# Altium PCB BMI088_CORE.PcbDoc
Units mil, origin at the board's own origin, x right, y up, seen from the top; angles counter-clockwise.
Board outline 3866.14 x 748.03 mil, 2 copper layers (Top Layer, Bottom Layer); 70 components, 18 nets, 335 pads, 170 vias.
Unrouted connection lines stored in the file: 72.
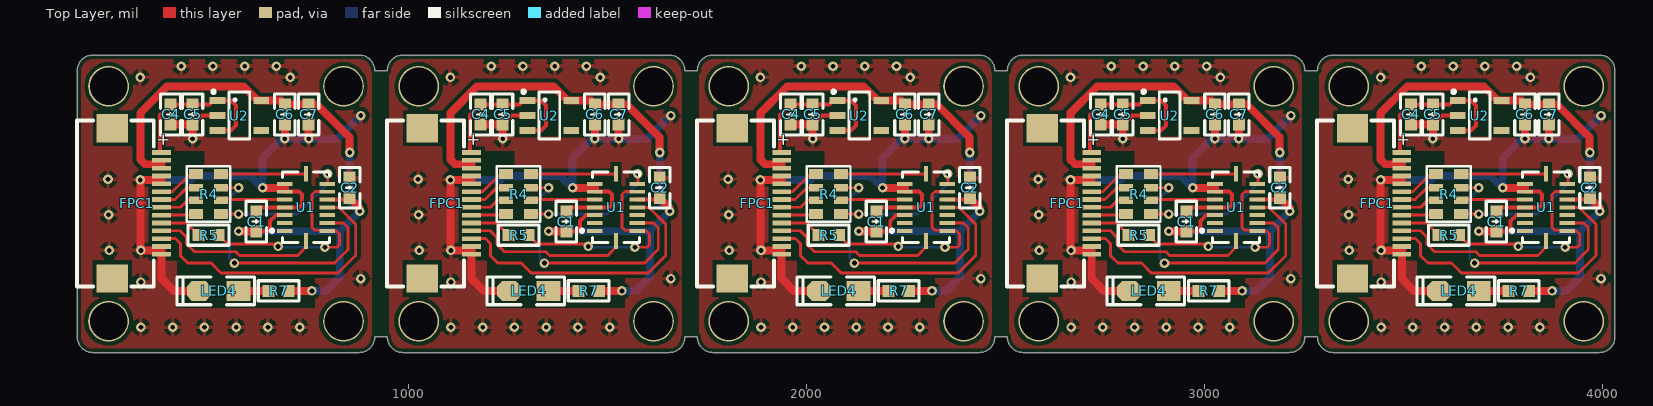
[diagram p0: Top Layer view]
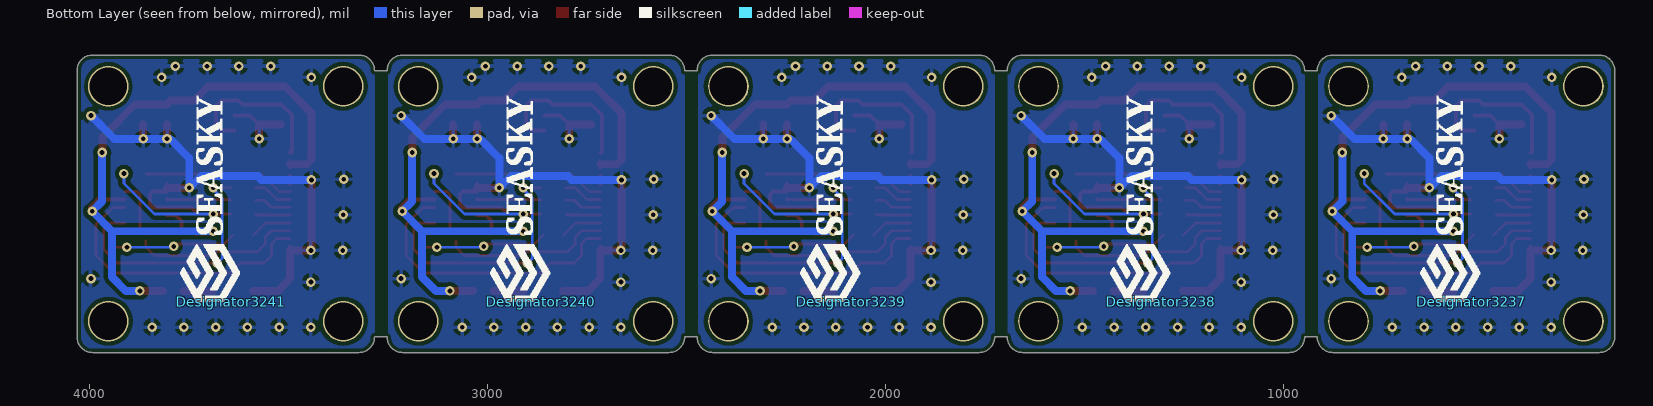
[diagram p1: Bottom Layer view, seen from below]
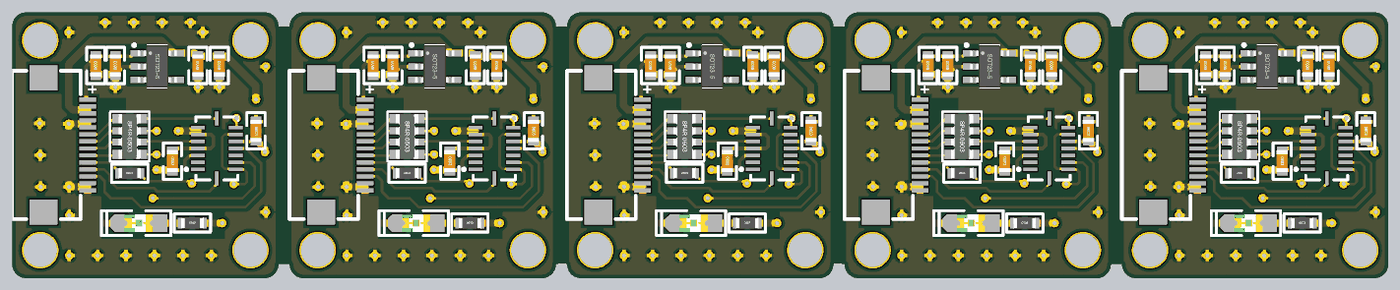
[diagram p2: 3D render of the assembled board from above, using the file's embedded part models]

## Layer stack, top to bottom
Top Solder: solder mask 0.4, Solder Resist, Dk 3.5
Top Layer: signal copper 1.4
Dielectric 1: dielectric 12.6, FR-4, Dk 4.8
Bottom Layer: signal copper 1.4
Bottom Solder: solder mask 0.4, Solder Resist, Dk 3.5

## Board outline
166.26,185.08 ccw(c205.63,185.08) 205.63,145.71 874.92,145.71 ccw(c874.92,185.08) 914.29,185.08 945.79,185.08 ccw(c985.16,185.08) 985.16,145.71 1654.45,145.71 ccw(c1654.45,185.08) 1693.82,185.08 1725.31,185.08 ccw(c1764.68,185.08) 1764.68,145.71 2433.98,145.71 ccw(c2433.98,185.08) 2473.35,185.08 2504.84,185.08 ccw(c2544.21,185.08) 2544.21,145.71 3213.5,145.71 ccw(c3213.5,185.08) 3252.87,185.08 3284.37,185.08 ccw(c3323.74,185.08) 3323.74,145.71 3993.03,145.71 ccw(c3993.03,185.08) 4032.4,185.08 4032.4,854.37 ccw(c3993.03,854.37) 3993.03,893.74 3323.74,893.74 ccw(c3323.74,854.37) 3284.37,854.37 3268.62,854.37 3252.87,854.37 ccw(c3213.5,854.37) 3213.5,893.74 2544.21,893.74 ccw(c2544.21,854.37) 2504.84,854.37 2489.09,854.37 2473.35,854.37 ccw(c2433.98,854.37) 2433.98,893.74 1764.68,893.74 ccw(c1764.68,854.37) 1725.31,854.37 1709.57,854.37 1693.82,854.37 ccw(c1654.45,854.37) 1654.45,893.74 985.16,893.74 ccw(c985.16,854.37) 945.79,854.37 930.04,854.37 914.29,854.37 ccw(c874.92,854.37) 874.92,893.74 205.63,893.74 ccw(c205.63,854.37) 166.26,854.37

## Design rules (kind name [scope] priority, off if disabled: settings)
BoardOutlineClearance [All] p1: gap=10 ignorepadtopadclearanceinfootprint=FALSE except(0: Arc-SplitContinuation Track-SplitContinuation SMDPad-SplitContinuation THPad-SplitContinuation Via-SplitContinuation Fill-SplitContinuation Poly-SplitContinuation Region-SplitContinuation Text-SplitContinuation)
Clearance [All] p1: gap=10 ignorepadtopadclearanceinfootprint=FALSE except(0: Arc-Hole Track-Hole SMDPad-Hole THPad-Hole Via-Hole Fill-Hole Poly-Hole Region-Hole Text-Hole)
PolygonConnect [All] p1: connectstyle=Relief reliefconductorwidth=10 reliefentries=4 polygonreliefangle="90 Angle" airgapwidth=10
RoutingVias [All] p1: holewidth=28 width=50 viastyle="Through Hole" minholewidth=28 minwidth=50 maxholewidth=28 maxwidth=50
SolderMaskExpansion [All] p1: expansion=4
Width [All] p1: maxlimit=10 minlimit=10 preferedwidth=10
30 further rules are at their usual default settings.

## Components (designator, comment, footprint, x,y, rotation, side; value= is the part's Value field where it differs from the comment)
C1 "0.1uF" "C 0603_L" 3734.37,475.11 r270 top
C1 "0.1uF" "C 0603_L" 2954.85,475.11 r270 top
C1 "0.1uF" "C 0603_L" 2175.32,475.11 r270 top
C1 "0.1uF" "C 0603_L" 1395.79,475.11 r270 top
C1 "0.1uF" "C 0603_L" 616.26,475.11 r270 top
C2 "0.1uF" "C 0603_L" 3969.37,560.04 r270 top
C2 "0.1uF" "C 0603_L" 3189.84,560.04 r270 top
C2 "0.1uF" "C 0603_L" 2410.31,560.04 r270 top
C2 "0.1uF" "C 0603_L" 1630.79,560.04 r270 top
C2 "0.1uF" "C 0603_L" 851.26,560.04 r270 top
C4 "10uF" "C 0603_L" 3519.04,744.24 r90 top
C4 "10uF" "C 0603_L" 2739.51,744.24 r90 top
C4 "10uF" "C 0603_L" 1959.98,744.24 r90 top
C4 "10uF" "C 0603_L" 1180.45,744.24 r90 top
C4 "10uF" "C 0603_L" 400.93,744.24 r90 top
C5 "0.1uF" "C 0603_L" 3574.37,744.24 r90 top
C5 "0.1uF" "C 0603_L" 2794.84,744.24 r90 top
C5 "0.1uF" "C 0603_L" 2015.31,744.24 r90 top
C5 "0.1uF" "C 0603_L" 1235.79,744.24 r90 top
C5 "0.1uF" "C 0603_L" 456.26,744.24 r90 top
C6 "10uF" "C 0603_L" 3806.13,744.24 r90 top
C6 "10uF" "C 0603_L" 3026.6,744.24 r90 top
C6 "10uF" "C 0603_L" 2247.08,744.24 r90 top
C6 "10uF" "C 0603_L" 1467.55,744.24 r90 top
C6 "10uF" "C 0603_L" 688.02,744.24 r90 top
C7 "0.1uF" "C 0603_L" 3866.13,744.24 r90 top
C7 "0.1uF" "C 0603_L" 3086.6,744.24 r90 top
C7 "0.1uF" "C 0603_L" 2307.08,744.24 r90 top
C7 "0.1uF" "C 0603_L" 1527.55,744.24 r90 top
C7 "0.1uF" "C 0603_L" 748.02,744.24 r90 top
Designator3237 "Comment" SEASKY1 527.57,273.06 r90 bottom
Designator3238 "Comment" SEASKY1 1307.09,273.06 r90 bottom
Designator3239 "Comment" SEASKY1 2086.62,273.06 r90 bottom
Designator3240 "Comment" SEASKY1 2866.15,273.06 r90 bottom
Designator3241 "Comment" SEASKY1 3645.68,273.06 r90 bottom
FPC1 "FPC14" FPC-SMD_P0.50-14P_QCHF-SM-H2.0 3434.37,520.71 r90 top
FPC1 "FPC14" FPC-SMD_P0.50-14P_QCHF-SM-H2.0 2654.84,520.71 r90 top
FPC1 "FPC14" FPC-SMD_P0.50-14P_QCHF-SM-H2.0 1875.31,520.71 r90 top
FPC1 "FPC14" FPC-SMD_P0.50-14P_QCHF-SM-H2.0 1095.79,520.71 r90 top
FPC1 "FPC14" FPC-SMD_P0.50-14P_QCHF-SM-H2.0 316.26,520.71 r90 top
LED4 "红色" "LED 0805G" 3639.96,300.71 r180 top
LED4 "红色" "LED 0805G" 2860.43,300.71 r180 top
LED4 "红色" "LED 0805G" 2080.9,300.71 r180 top
LED4 "红色" "LED 0805G" 1301.37,300.71 r180 top
LED4 "红色" "LED 0805G" 521.85,300.71 r180 top
R4 "220R" RCA-8P4R-0603 3614.37,544.29 r270 top
R4 "220R" RCA-8P4R-0603 2834.84,544.29 r270 top
R4 "220R" RCA-8P4R-0603 2055.31,544.29 r270 top
R4 "220R" RCA-8P4R-0603 1275.79,544.29 r270 top
R4 "220R" RCA-8P4R-0603 496.26,544.29 r270 top
R5 "220R" "R 0603_L" 3614.37,441.06 r0 top
R5 "220R" "R 0603_L" 2834.84,441.06 r0 top
R5 "220R" "R 0603_L" 2055.31,441.06 r0 top
R5 "220R" "R 0603_L" 1275.79,441.06 r0 top
R5 "220R" "R 0603_L" 496.26,441.06 r0 top
R7 "10K" "R 0603_L" 3790.54,300.71 r0 top
R7 "10K" "R 0603_L" 3011.02,300.71 r0 top
R7 "10K" "R 0603_L" 2231.49,300.71 r0 top
R7 "10K" "R 0603_L" 1451.96,300.71 r0 top
R7 "10K" "R 0603_L" 672.43,300.71 r0 top
U1 "BMI088" BOSC-LGA-16-BMI088_V 3859.37,510.71 r90 top
U1 "BMI088" BOSC-LGA-16-BMI088_V 3079.84,510.71 r90 top
U1 "BMI088" BOSC-LGA-16-BMI088_V 2300.31,510.71 r90 top
U1 "BMI088" BOSC-LGA-16-BMI088_V 1520.79,510.71 r90 top
U1 "BMI088" BOSC-LGA-16-BMI088_V 741.26,510.71 r90 top
U2 "RT9013-33GB" SOT23-5L 3691.96,741.51 r270 top
U2 "RT9013-33GB" SOT23-5L 2912.43,741.51 r270 top
U2 "RT9013-33GB" SOT23-5L 2132.9,741.51 r270 top
U2 "RT9013-33GB" SOT23-5L 1353.38,741.51 r270 top
U2 "RT9013-33GB" SOT23-5L 573.85,741.51 r270 top

## Footprints (in the part's own frame and the unit in brackets; to place one, negate y for a bottom-side part, rotate by r counter-clockwise, add the part's x,y. Pads: shape width x height; smd on the part's side, far side on the other; paste and mask are expansions set on the pad)
BOSC-LGA-16-BMI088_V [mm] "LGA, 16-Leads, Body 3.0x4.5mm, Pitch 0.5mm"
  rect 0.25x1 smd: 1(-1.5,1.35) 2(-1,1.35) 3(-0.5,1.35) 4(0,1.35) 5(0.5,1.35) 6(1,1.35) 7(1.5,1.35) 9(1.5,-1.35) 10(1,-1.35) 11(0.5,-1.35) 12(0,-1.35) 13(-0.5,-1.35) 14(-1,-1.35) 15(-1.5,-1.35)
  rect 1x0.25 smd: 8(2.15,0) 16(-2.15,0)
  silkscreen extent -2.25,-1.5 2.25,2.28, body extent -2.25,-1.5 2.25,1.5, height 0.95
"C 0603_L" [mil] "无极性贴片电容                                       淘宝ID:黄晶宝石"
  rect 30x30 smd: 1(-25.59,0) 2(25.59,0)
  silkscreen extent -51,-26 51,26, body extent -31,-16 31,16, height 32
FPC-SMD_P0.50-14P_QCHF-SM-H2.0 [mm]
  rect 0.3x1.2 smd: 1(3.25,-1.575) 2(2.75,-1.575) 3(2.25,-1.575) 4(1.75,-1.575) 5(1.25,-1.575) 6(0.75,-1.575) 7(0.25,-1.575) 8(-0.25,-1.575) 9(-0.75,-1.575) 10(-1.25,-1.575) 11(-1.75,-1.575) 12(-2.25,-1.575) 13(-2.75,-1.575) 14(-3.25,-1.575)
  rect 1.8x2 smd: 15(4.8,1.575) 16(-4.8,1.575)
  silkscreen extent -5.3,-1.08 5.3,3.82
"LED 0805G" [mil] "绿色0805LED                              淘宝ID:黄晶宝石"
  rect 60x50 smd: 1(-50,0)
  oct 60x50 smd: 2(50,0)
  silkscreen extent -90,-35 105,35, body extent -39,-25 39,25, height 26
"R 0603_L" [mil] "1/10W贴片电阻                 淘宝ID:黄晶宝石"
  rect 30x30 smd: 1(-25.59,0) 2(25.59,0)
  silkscreen extent -51,-26 51,26, body extent -31,-16 32,16, height 16
RCA-8P4R-0603 [mm] "3.2mm*1.6mm*0.6mm(长*宽*厚)"
  rect 0.65x0.9 smd: 1(-1.28,-0.8) 4(1.28,-0.8) 5(1.28,0.8) 8(-1.28,0.8)
  rect 0.5x0.9 smd: 2(-0.4,-0.8) 3(0.4,-0.8) 6(0.4,0.8) 7(-0.4,0.8)
  silkscreen extent -1.78,-1.4 1.78,1.4, body extent -1.6,-0.8 1.6,0.8, height 0.6
SEASKY1 [mil]
  silkscreen extent 0,-23 518,126
SOT23-5L [mm] "3x1.6x1.1mm(长宽高) 封装库来自淘宝卖家 ID：黄晶宝石"
  rect 0.45x1 smd: 1(-0.95,-1.4) 2(0,-1.4) 3(0.95,-1.4) 4(0.95,1.4) 5(-0.95,1.4)
  silkscreen extent -1.6,-1.73 1.5,0.66, body extent -1.5,-1.4 1.5,1.4, height 1.15

## Part data
C1 C1 C1 C1 C1 C2 C2 C2 C2 C2 C4 C4 C4 C4 C4 C5 C5 C5 C5 C5 C6 C6 C6 C6 C6 C7 C7 C7 C7 C7: library part C, "贴片电容"
LED4 LED4 LED4 LED4 LED4: library part LED-SMD, "贴片LED"
R4 R4 R4 R4 R4: library part R-8P4R, "贴片排阻"
R5 R5 R5 R5 R5 R7 R7 R7 R7 R7: library part R, "贴片电阻"
U1 U1 U1 U1 U1: library part BOSC-BMI088-LGA-16, "6-axis Motion Tracking for High-performance Applications,", Manufacturer_Name=Bosch, Arrow Part Number=BMI088, Arrow Price/Stock=https://www.arrow.com/en/products/bmi088/bosch, Datasheet Link=https://ae-bst.resource.bosch.com/media/_tech/media/datasheets/BST-BMI088-DS001-13.pdf, Geometry.Height=1.45mm, Manufacturer_Part_Number=BMI088

## Free pads (board coordinates)
  round 102.36 hole 94.49: ""(245,224.45) ""(245,815) ""(835.55,224.45) ""(835.55,815) ""(1024.53,224.45) ""(1024.53,815) ""(1615.08,224.45) ""(1615.08,815) ""(1804.05,224.45) ""(1804.05,815) ""(2394.61,224.45) ""(2394.61,815) ""(2583.58,224.45) ""(2583.58,815) ""(3174.13,224.45) ""(3174.13,815) ""(3363.11,224.45) ""(3363.11,815) ""(3953.66,224.45) ""(3953.66,815)

## Via types
v1: diameter 24, hole 12, Top Layer to Bottom Layer, 170 vias

## Nets (pads, with @x,y where several pads share a name; then routed paths per layer and width w, separated by ;. In a path a pad name is that pad's centre, name@x,y a point inside that pad or via, vN(x,y) a via of type N, cw(c..) or ccw(c..) an arc to the next point about the centre after c; other vN are vias at no path point)
CSB_ACCEL: R4.7 U1.14 | length 3302.4
  Top Layer w7: R4.7@527.76,560.04 v1(571.85,560.04) ; v1(561.26,370.71) 813.5,370.71 847.2,404.4 847.2,459.69 835.55,471.34 U1.14@794.41,471.34 ; R4.7@1307.28,560.04 v1(1351.38,560.04) ; v1(1340.79,370.71) 1593.03,370.71 1626.72,404.4 1626.72,459.69 1615.08,471.34 U1.14@1573.94,471.34 ; R4.7@2086.81,560.04 v1(2130.9,560.04) ; v1(2120.31,370.71) 2372.56,370.71 2406.25,404.4 2406.25,459.69 2394.61,471.34 U1.14@2353.46,471.34 ; R4.7@2866.34,560.04 v1(2910.43,560.04) ; v1(2899.84,370.71) 3152.09,370.71 3185.78,404.4 3185.78,459.69 3174.13,471.34 U1.14@3132.99,471.34 ; R4.7@3645.87,560.04 v1(3689.96,560.04) ; v1(3679.37,370.71) 3931.61,370.71 3965.31,404.4 3965.31,459.69 3953.66,471.34 U1.14@3912.52,471.34
  Bottom Layer w7: v1(561.26,370.71) 549.35,382.62 549.35,533.8 571.85,556.3 v1(571.85,560.04) ; v1(1340.79,370.71) 1328.87,382.62 1328.87,533.8 1351.38,556.3 v1(1351.38,560.04) ; v1(2120.31,370.71) 2108.4,382.62 2108.4,533.8 2130.9,556.3 v1(2130.9,560.04) ; v1(2899.84,370.71) 2887.93,382.62 2887.93,533.8 2910.43,556.3 v1(2910.43,560.04) ; v1(3679.37,370.71) 3667.46,382.62 3667.46,533.8 3689.96,556.3 v1(3689.96,560.04)
CSB_GYRO: R4.6 U1.5 | length 806.2
  Top Layer w7: R4.6@527.76,528.55 529.53,530.32 529.6,530.39 U1.5@688.11,530.39 ; R4.6@1307.28,528.55 1309.05,530.32 1309.13,530.39 U1.5@1467.64,530.39 ; R4.6@2086.81,528.55 2088.58,530.32 2088.66,530.39 U1.5@2247.17,530.39 ; R4.6@2866.34,528.55 2868.11,530.32 2868.19,530.39 U1.5@3026.69,530.39 ; R4.6@3645.87,528.55 3647.64,530.32 3647.71,530.39 U1.5@3806.22,530.39
  Top Layer w10: U1.5@688.03,530.32 U1.5@688.11,530.39 ; U1.5@1467.56,530.32 U1.5@1467.64,530.39 ; U1.5@2247.09,530.32 U1.5@2247.17,530.39 ; U1.5@3026.61,530.32 U1.5@3026.69,530.39 ; U1.5@3806.14,530.32 U1.5@3806.22,530.39
GND: C1.1 C2.1 C4.1 C5.1 C6.1 C7.1 FPC1.4 FPC1.5 FPC1.13 FPC1.14 LED4.2 U1.4 U1.6 U1.7 U2.2 | length 8408.8
  Top Layer w10: FPC1.14@378.27,392.76 378.27,402.6 FPC1.13@378.27,412.44 ; FPC1.5@378.27,569.92 378.27,579.76 FPC1.4@378.27,589.61 ; C5.1@456.26,718.64 479.13,741.51 U2.2@518.73,741.51 ; C1.1@616.26,500.71 626.26,510.71 688.11,510.71 688.19,510.79 723.87,510.79 731.26,518.18 731.26,542.77 723.95,550.08 688.11,550.08 688.11,559.92 U1.7@688.11,569.76 ; FPC1.14@1157.8,392.76 1157.8,402.6 FPC1.13@1157.8,412.44 ; FPC1.5@1157.8,569.92 1157.8,579.76 FPC1.4@1157.8,589.61 ; C5.1@1235.79,718.64 1258.66,741.51 U2.2@1298.26,741.51 ; C1.1@1395.79,500.71 1405.79,510.71 1467.64,510.71 1467.72,510.79 1503.4,510.79 1510.79,518.18 1510.79,542.77 1503.48,550.08 1467.64,550.08 1467.64,559.92 U1.7@1467.64,569.76 ; FPC1.14@1937.32,392.76 1937.32,402.6 FPC1.13@1937.32,412.44 ; FPC1.5@1937.32,569.92 1937.32,579.76 FPC1.4@1937.32,589.61 ; C5.1@2015.32,718.64 2038.19,741.51 U2.2@2077.79,741.51 ; C1.1@2175.31,500.71 2185.31,510.71 2247.17,510.71 2247.24,510.79 2282.93,510.79 2290.32,518.18 2290.32,542.77 2283.01,550.08 2247.17,550.08 2247.17,559.92 U1.7@2247.17,569.76 ; FPC1.14@2716.85,392.76 2716.85,402.6 FPC1.13@2716.85,412.44 ; FPC1.5@2716.85,569.92 2716.85,579.76 FPC1.4@2716.85,589.61 ; C5.1@2794.85,718.64 2817.71,741.51 U2.2@2857.31,741.51 ; C1.1@2954.84,500.71 2964.84,510.71 3026.69,510.71 3026.77,510.79 3062.45,510.79 3069.85,518.18 3069.85,542.77 3062.54,550.08 3026.69,550.08 3026.69,559.92 U1.7@3026.69,569.76 ; FPC1.14@3496.38,392.76 3496.38,402.6 FPC1.13@3496.38,412.44 ; FPC1.5@3496.38,569.92 3496.38,579.76 FPC1.4@3496.38,589.61 ; C5.1@3574.37,718.64 3597.24,741.51 U2.2@3636.84,741.51 ; C1.1@3734.37,500.71 3744.37,510.71 3806.22,510.71 3806.3,510.79 3841.98,510.79 3849.37,518.18 3849.37,542.77 3842.06,550.08 3806.22,550.08 3806.22,559.92 U1.7@3806.22,569.76
  Top Layer w20: FPC1.14@378.27,392.76 378.27,331.73 409.29,300.71 LED4.2@471.85,300.71 ; 378.27,402.6 v1(326.26,402.6) 324.84,404.02 v1(324.84,579.76) 378.27,579.76 ; C4.1@400.93,718.64 456.26,718.64 v1(456.26,683.07) ; v1(632.09,560.04) 632.21,559.92 688.11,559.92 ; v1(688.03,683.07) C6.1@688.03,718.64 ; v1(748.03,683.07) C7.1@748.03,718.64 ; FPC1.14@1157.8,392.76 1157.8,331.73 1188.82,300.71 LED4.2@1251.37,300.71 ; 1157.8,402.6 v1(1105.79,402.6) 1104.37,404.02 v1(1104.37,579.76) 1157.8,579.76 ; C4.1@1180.46,718.64 1235.79,718.64 v1(1235.79,683.07) ; v1(1411.62,560.04) 1411.74,559.92 1467.64,559.92 ; v1(1467.55,683.07) C6.1@1467.55,718.64 ; v1(1527.55,683.07) C7.1@1527.55,718.64 ; 1937.32,402.6 v1(1885.31,402.6) 1883.89,404.02 v1(1883.89,579.76) 1937.32,579.76 ; FPC1.14@1937.33,392.76 1937.33,331.73 1968.35,300.71 LED4.2@2030.9,300.71 ; C4.1@1959.99,718.64 2015.32,718.64 v1(2015.32,683.07) ; v1(2191.14,560.04) 2191.27,559.92 2247.17,559.92 ; v1(2247.08,683.07) C6.1@2247.08,718.64 ; v1(2307.08,683.07) C7.1@2307.08,718.64 ; FPC1.14@2716.85,392.76 2716.85,331.73 2747.88,300.71 LED4.2@2810.43,300.71 ; 2716.85,402.6 v1(2664.84,402.6) 2663.42,404.02 v1(2663.42,579.76) 2716.85,579.76 ; C4.1@2739.51,718.64 2794.85,718.64 v1(2794.85,683.07) ; v1(2970.67,560.04) 2970.79,559.92 3026.69,559.92 ; v1(3026.61,683.07) C6.1@3026.61,718.64 ; v1(3086.61,683.07) C7.1@3086.61,718.64 ; FPC1.14@3496.38,392.76 3496.38,331.73 3527.4,300.71 LED4.2@3589.96,300.71 ; 3496.38,402.6 v1(3444.37,402.6) 3442.95,404.02 v1(3442.95,579.76) 3496.38,579.76 ; C4.1@3519.04,718.64 3574.37,718.64 v1(3574.37,683.07) ; v1(3750.2,560.04) 3750.32,559.92 3806.22,559.92 ; v1(3806.14,683.07) C6.1@3806.14,718.64 ; v1(3866.14,683.07) C7.1@3866.14,718.64
  Bottom Layer w20: v1(324.84,579.76) 450.25,579.76 459.53,589.04 602.01,589.04 631.01,560.04 v1(632.09,560.04) 632.09,634.49 680.67,683.07 v1(688.03,683.07) v1(748.03,683.07) 820.74,683.07 v1(879.19,741.51) ; v1(1104.37,579.76) 1229.78,579.76 1239.06,589.04 1381.53,589.04 1410.53,560.04 v1(1411.62,560.04) 1411.62,634.49 1460.2,683.07 v1(1467.55,683.07) v1(1527.55,683.07) 1600.27,683.07 v1(1658.71,741.51) ; v1(1883.89,579.76) 2009.31,579.76 2018.59,589.04 2161.06,589.04 2190.06,560.04 v1(2191.14,560.04) 2191.14,634.49 2239.72,683.07 v1(2247.08,683.07) v1(2307.08,683.07) 2379.8,683.07 v1(2438.24,741.51) ; v1(2663.42,579.76) 2788.83,579.76 2798.11,589.04 2940.59,589.04 2969.59,560.04 v1(2970.67,560.04) 2970.67,634.49 3019.25,683.07 v1(3026.61,683.07) v1(3086.61,683.07) 3159.33,683.07 v1(3217.77,741.51) ; v1(3442.95,579.76) 3568.36,579.76 3577.64,589.04 3720.12,589.04 3749.12,560.04 v1(3750.2,560.04) 3750.2,634.49 3798.78,683.07 v1(3806.14,683.07) v1(3866.14,683.07) 3938.85,683.07 v1(3997.3,741.51)
  other v1: 326.26,209.46 406.1,209.46 485.94,209.46 565.77,209.46 645.61,209.46 725.45,209.46 1105.79,209.46 1185.63,209.46 1265.46,209.46 1345.3,209.46 1425.14,209.46 1504.98,209.46 1885.31,209.46 1965.15,209.46 2044.99,209.46 2124.83,209.46 2204.67,209.46 2284.51,209.46 2664.84,209.46 2744.68,209.46 2824.52,209.46 2904.36,209.46 2984.2,209.46 3064.03,209.46 3444.37,209.46 3524.21,209.46 3604.05,209.46 3683.88,209.46 3763.72,209.46 3843.56,209.46 326.26,322.76 1105.79,322.76 1885.31,322.76 2664.84,322.76 3444.37,322.76 879.19,331.73 1658.71,331.73 2438.24,331.73 3217.77,331.73 3997.3,331.73 246.42,402.6 1025.95,402.6 1805.48,402.6 2585,402.6 3364.53,402.6 245,491.89 1024.53,491.89 1804.05,491.89 2583.58,491.89 3363.11,491.89 243.58,581.19 1023.11,581.19 1802.63,581.19 2582.16,581.19 3361.69,581.19 324.84,837.37 701.77,837.37 1104.37,837.37 1481.3,837.37 1883.89,837.37 2260.82,837.37 2663.42,837.37 3040.35,837.37 3442.95,837.37 3819.88,837.37 427.49,865.71 507.32,865.71 587.16,865.71 667,865.71 1207.01,865.71 1286.85,865.71 1366.69,865.71 1446.53,865.71 1986.54,865.71 2066.38,865.71 2146.22,865.71 2226.06,865.71 2766.07,865.71 2845.91,865.71 2925.75,865.71 3005.58,865.71 3545.6,865.71 3625.43,865.71 3705.27,865.71 3785.11,865.71
INT1_ACCEL: FPC1.11 U1.16 | length 2112.6
  Top Layer w7: FPC1.11@378.27,451.81 425.04,451.81 441.26,435.59 441.26,418.61 460.86,399.01 564.78,399.01 573.85,389.94 720.49,389.94 741.26,410.71 U1.16@741.26,426.06 ; FPC1.11@1157.8,451.81 1204.56,451.81 1220.79,435.59 1220.79,418.61 1240.39,399.01 1344.31,399.01 1353.38,389.94 1500.02,389.94 1520.79,410.71 U1.16@1520.79,426.06 ; FPC1.11@1937.32,451.81 1984.09,451.81 2000.31,435.59 2000.31,418.61 2019.91,399.01 2123.83,399.01 2132.9,389.94 2279.55,389.94 2300.31,410.71 U1.16@2300.31,426.06 ; FPC1.11@2716.85,451.81 2763.62,451.81 2779.84,435.59 2779.84,418.61 2799.44,399.01 2903.36,399.01 2912.43,389.94 3059.08,389.94 3079.84,410.71 U1.16@3079.84,426.06 ; FPC1.11@3496.38,451.81 3543.15,451.81 3559.37,435.59 3559.37,418.61 3578.97,399.01 3682.89,399.01 3691.96,389.94 3838.6,389.94 3859.37,410.71 U1.16@3859.37,426.06
INT2_ACCEL: U1.1
INT3_GYRO: FPC1.12 U1.12 | length 3638.9
  Top Layer w7: FPC1.12@378.27,432.13 412.8,432.13 425.65,419.28 425.65,389.02 443.96,370.71 503.04,370.71 528.04,345.71 822.2,345.71 866.26,389.77 866.26,468.41 823.97,510.71 U1.12@794.41,510.71 ; FPC1.12@1157.8,432.13 1192.33,432.13 1205.18,419.28 1205.18,389.02 1223.49,370.71 1282.57,370.71 1307.57,345.71 1601.72,345.71 1645.79,389.77 1645.79,468.41 1603.49,510.71 U1.12@1573.94,510.71 ; FPC1.12@1937.32,432.13 1971.86,432.13 1984.7,419.28 1984.7,389.02 2003.02,370.71 2062.09,370.71 2087.09,345.71 2381.25,345.71 2425.31,389.77 2425.31,468.41 2383.02,510.71 U1.12@2353.46,510.71 ; FPC1.12@2716.85,432.13 2751.39,432.13 2764.23,419.28 2764.23,389.02 2782.54,370.71 2841.62,370.71 2866.62,345.71 3160.78,345.71 3204.84,389.77 3204.84,468.41 3162.55,510.71 U1.12@3132.99,510.71 ; FPC1.12@3496.38,432.13 3530.91,432.13 3543.76,419.28 3543.76,389.02 3562.07,370.71 3621.15,370.71 3646.15,345.71 3940.31,345.71 3984.37,389.77 3984.37,468.41 3942.08,510.71 U1.12@3912.52,510.71
INT4_GYRO: U1.13
NetFPC1_6: FPC1.6 R4.1 | length 524.5
  Top Layer w7: FPC1.6@378.27,550.24 406.12,550.24 450.57,594.69 R4.1@464.76,594.69 ; FPC1.6@1157.8,550.24 1185.65,550.24 1230.1,594.69 R4.1@1244.29,594.69 ; FPC1.6@1937.32,550.24 1965.18,550.24 2009.63,594.69 R4.1@2023.82,594.69 ; FPC1.6@2716.85,550.24 2744.71,550.24 2789.16,594.69 R4.1@2803.35,594.69 ; FPC1.6@3496.38,550.24 3524.23,550.24 3568.68,594.69 R4.1@3582.87,594.69
NetFPC1_7: FPC1.7 R4.2 | length 493.6
  Top Layer w7: FPC1.7@378.27,530.55 411.98,530.55 441.47,560.04 R4.2@464.76,560.04 ; FPC1.7@1157.8,530.55 1191.5,530.55 1221,560.04 R4.2@1244.29,560.04 ; FPC1.7@1937.32,530.55 1971.03,530.55 2000.53,560.04 R4.2@2023.82,560.04 ; FPC1.7@2716.85,530.55 2750.56,530.55 2780.05,560.04 R4.2@2803.35,560.04 ; FPC1.7@3496.38,530.55 3530.09,530.55 3559.58,560.04 R4.2@3582.87,560.04
NetFPC1_8: FPC1.8 R4.3 | length 469.1
  Top Layer w7: FPC1.8@378.27,510.87 425.97,510.87 443.64,528.55 R4.3@464.76,528.55 ; FPC1.8@1157.8,510.87 1205.49,510.87 1223.17,528.55 R4.3@1244.29,528.55 ; FPC1.8@1937.32,510.87 1985.02,510.87 2002.7,528.55 R4.3@2023.82,528.55 ; FPC1.8@2716.85,510.87 2764.55,510.87 2782.23,528.55 R4.3@2803.35,528.55 ; FPC1.8@3496.38,510.87 3544.08,510.87 3561.75,528.55 R4.3@3582.87,528.55
NetFPC1_9: FPC1.9 R4.4 | length 438.1
  Top Layer w7: FPC1.9@378.27,491.18 462.04,491.18 R4.4@464.76,493.9 ; FPC1.9@1157.8,491.18 1241.57,491.18 R4.4@1244.29,493.9 ; FPC1.9@1937.33,491.18 2021.1,491.18 R4.4@2023.82,493.9 ; FPC1.9@2716.85,491.18 2800.63,491.18 R4.4@2803.35,493.9 ; FPC1.9@3496.38,491.18 3580.15,491.18 R4.4@3582.87,493.9
NetFPC1_10: FPC1.10 R5.1 | length 525
  Top Layer w7: FPC1.10@378.27,471.5 440.23,471.5 R5.1@470.67,441.06 ; FPC1.10@1157.8,471.5 1219.75,471.5 R5.1@1250.19,441.06 ; FPC1.10@1937.32,471.5 1999.28,471.5 R5.1@2029.72,441.06 ; FPC1.10@2716.85,471.5 2778.81,471.5 R5.1@2809.25,441.06 ; FPC1.10@3496.38,471.5 3558.34,471.5 R5.1@3588.78,441.06
NetLED4_1: LED4.1 R7.1 | length 375
  Top Layer w20: LED4.1@571.85,300.7 R7.1@646.84,300.7 ; LED4.1@1351.38,300.7 R7.1@1426.37,300.7 ; LED4.1@2130.9,300.7 R7.1@2205.89,300.7 ; LED4.1@2910.43,300.7 R7.1@2985.42,300.7 ; LED4.1@3689.96,300.7 R7.1@3764.95,300.7
SPI1_CLK: R4.8 U1.8 | length 1068.9
  Top Layer w7: R4.8@527.76,594.69 740.59,594.69 U1.8@741.26,595.35 ; R4.8@1307.28,594.69 1520.12,594.69 U1.8@1520.79,595.35 ; R4.8@2086.81,594.69 2299.65,594.69 U1.8@2300.31,595.35 ; R4.8@2866.34,594.69 3079.18,594.69 U1.8@3079.84,595.35 ; R4.8@3645.87,594.69 3858.7,594.69 U1.8@3859.37,595.35
SPI1_MISO: R5.2 U1.10 U1.15 | length 2730.9
  Top Layer w7: R5.2@521.85,441.06 544.1,418.81 664.89,418.81 v1(671.26,412.44) ; v1(788.85,410.71) 819.92,410.71 825.55,416.34 825.55,443.57 817.46,451.65 794.41,451.65 792.99,453.08 763.57,453.08 756.26,460.39 756.26,542.77 764.2,550.71 793.78,550.71 U1.10@794.41,550.08 ; R5.2@1301.37,441.06 1323.63,418.81 1444.42,418.81 v1(1450.79,412.44) ; v1(1568.37,410.71) 1599.45,410.71 1605.08,416.34 1605.08,443.57 1596.99,451.65 1573.94,451.65 1572.52,453.08 1543.1,453.08 1535.79,460.39 1535.79,542.77 1543.73,550.71 1573.31,550.71 U1.10@1573.94,550.08 ; R5.2@2080.9,441.06 2103.15,418.81 2223.95,418.81 v1(2230.32,412.44) ; v1(2347.9,410.71) 2378.98,410.71 2384.61,416.34 2384.61,443.57 2376.52,451.65 2353.46,451.65 2352.04,453.08 2322.63,453.08 2315.31,460.39 2315.31,542.77 2323.25,550.71 2352.83,550.71 U1.10@2353.46,550.08 ; R5.2@2860.43,441.06 2882.68,418.81 3003.47,418.81 v1(3009.85,412.44) ; v1(3127.43,410.71) 3158.5,410.71 3164.13,416.34 3164.13,443.57 3156.05,451.65 3132.99,451.65 3131.57,453.08 3102.15,453.08 3094.84,460.39 3094.84,542.77 3102.78,550.71 3132.36,550.71 U1.10@3132.99,550.08 ; R5.2@3639.96,441.06 3662.21,418.81 3783,418.81 v1(3789.37,412.44) ; v1(3906.96,410.71) 3938.03,410.71 3943.66,416.34 3943.66,443.57 3935.57,451.65 3912.52,451.65 3911.1,453.08 3881.68,453.08 3874.37,460.39 3874.37,542.77 3882.31,550.71 3911.89,550.71 U1.10@3912.52,550.08
  Bottom Layer w7: v1(671.26,412.44) 672.99,410.71 v1(788.85,410.71) ; v1(1450.79,412.44) 1452.52,410.71 v1(1568.37,410.71) ; v1(2230.32,412.44) 2232.05,410.71 v1(2347.9,410.71) ; v1(3009.85,412.44) 3011.58,410.71 v1(3127.43,410.71) ; v1(3789.37,412.44) 3791.1,410.71 v1(3906.96,410.71)
SPI1_MOSI: R4.5 U1.9 | length 1761.4
  Top Layer w7: R4.5@527.76,493.9 v1(571.85,493.9) ; U1.9@794.41,569.76 794.84,569.76 796.26,571.19 v1(796.26,595.71) ; R4.5@1307.28,493.9 v1(1351.37,493.9) ; U1.9@1573.94,569.76 1574.37,569.76 1575.79,571.19 v1(1575.79,595.71) ; R4.5@2086.81,493.9 v1(2130.9,493.9) ; U1.9@2353.46,569.76 2353.89,569.76 2355.31,571.19 v1(2355.31,595.71) ; R4.5@2866.34,493.9 v1(2910.43,493.9) ; U1.9@3132.99,569.76 3133.42,569.76 3134.84,571.19 v1(3134.84,595.71) ; R4.5@3645.87,493.9 v1(3689.96,493.9) ; U1.9@3912.52,569.76 3912.95,569.76 3914.37,571.19 v1(3914.37,595.71)
  Bottom Layer w7: v1(571.85,493.9) 719.45,493.9 796.26,570.71 v1(796.26,595.71) ; v1(1351.37,493.9) 1498.98,493.9 1575.79,570.71 v1(1575.79,595.71) ; v1(2130.9,493.9) 2278.51,493.9 2355.31,570.71 v1(2355.31,595.71) ; v1(2910.43,493.9) 3058.03,493.9 3134.84,570.71 v1(3134.84,595.71) ; v1(3689.96,493.9) 3837.56,493.9 3914.37,570.71 v1(3914.37,595.71)
VCC3V3: C1.2 C2.2 C6.2 C7.2 FPC1.2 FPC1.3 R7.2 U1.3 U1.11 U2.5 | length 9151.4
  Top Layer w6: FPC1.3@378.27,609.29 378.27,619.13 FPC1.2@378.27,628.98 ; FPC1.3@1157.8,609.29 1157.8,619.13 FPC1.2@1157.8,628.98 ; FPC1.3@1937.32,609.29 1937.32,619.13 FPC1.2@1937.32,628.98 ; FPC1.3@2716.85,609.29 2716.85,619.13 FPC1.2@2716.85,628.98 ; FPC1.3@3496.38,609.29 3496.38,619.13 FPC1.2@3496.38,628.98
  Top Layer w10: C1.2@616.26,449.53 645.4,449.53 651.26,455.39 651.26,476.07 666.14,490.95 688.03,490.95 U1.3@688.11,491.02 ; U1.11@794.41,530.39 847.2,530.39 C2.2@851.26,534.45 ; C1.2@1395.79,449.53 1424.93,449.53 1430.79,455.39 1430.79,476.07 1445.67,490.95 1467.56,490.95 U1.3@1467.64,491.02 ; U1.11@1573.94,530.39 1626.72,530.39 C2.2@1630.78,534.45 ; C1.2@2175.31,449.53 2204.46,449.53 2210.31,455.39 2210.31,476.07 2225.19,490.95 2247.09,490.95 U1.3@2247.17,491.02 ; U1.11@2353.46,530.39 2406.25,530.39 C2.2@2410.31,534.45 ; C1.2@2954.84,449.53 2983.98,449.53 2989.84,455.39 2989.84,476.07 3004.72,490.95 3026.61,490.95 U1.3@3026.69,491.02 ; U1.11@3132.99,530.39 3185.78,530.39 C2.2@3189.84,534.45 ; C1.2@3734.37,449.53 3763.51,449.53 3769.37,455.39 3769.37,476.07 3784.25,490.95 3806.14,490.95 U1.3@3806.22,491.02 ; U1.11@3912.52,530.39 3965.31,530.39 C2.2@3969.37,534.45
  Top Layer w20: 378.27,619.13 336.55,619.13 324.84,630.85 324.84,662.25 324.84,667.25 324.84,747.77 392.06,815 584.34,815 620.42,778.91 628.97,778.91 678.94,778.91 688.03,769.83 748.03,769.83 767.95,769.83 850.49,687.28 850.49,649.42 v1(851.26,648.66) ; v1(571.85,450.71) 572.44,450.12 615.67,450.12 C1.2@616.26,449.53 ; R7.2@698.02,300.7 v1(756.26,300.71) ; C2.2@851.26,534.45 876.26,509.45 v1(876.26,500.71) ; 1157.8,619.13 1116.08,619.13 1104.37,630.85 1104.37,662.25 1104.37,667.25 1104.37,747.77 1171.59,815 1363.87,815 1399.95,778.91 1408.5,778.91 1458.46,778.91 1467.55,769.83 1527.55,769.83 1547.47,769.83 1630.02,687.28 1630.02,649.42 v1(1630.78,648.66) ; v1(1351.38,450.71) 1351.97,450.12 1395.2,450.12 C1.2@1395.79,449.53 ; R7.2@1477.55,300.7 v1(1535.79,300.71) ; C2.2@1630.78,534.45 1655.79,509.45 v1(1655.79,500.71) ; 1937.32,619.13 1895.61,619.13 1883.89,630.85 1883.89,662.25 1883.89,667.25 1883.89,747.77 1951.12,815 2143.39,815 2179.48,778.91 2188.02,778.91 2237.99,778.91 2247.08,769.83 2307.08,769.83 2327,769.83 2409.55,687.28 2409.55,649.42 v1(2410.31,648.66) ; v1(2130.9,450.71) 2131.49,450.12 2174.72,450.12 C1.2@2175.31,449.53 ; R7.2@2257.08,300.7 v1(2315.31,300.71) ; C2.2@2410.31,534.45 2435.31,509.45 v1(2435.31,500.71) ; 2716.85,619.13 2675.14,619.13 2663.42,630.85 2663.42,662.25 2663.42,667.25 2663.42,747.77 2730.65,815 2922.92,815 2959.01,778.91 2967.55,778.91 3017.52,778.91 3026.61,769.83 3086.61,769.83 3106.53,769.83 3189.07,687.28 3189.07,649.42 v1(3189.84,648.66) ; v1(2910.43,450.71) 2911.02,450.12 2954.25,450.12 C1.2@2954.84,449.53 ; R7.2@3036.61,300.7 v1(3094.84,300.71) ; C2.2@3189.84,534.45 3214.84,509.45 v1(3214.84,500.71) ; 3496.38,619.13 3454.66,619.13 3442.95,630.85 3442.95,662.25 3442.95,667.25 3442.95,747.77 3510.17,815 3702.45,815 3738.53,778.91 3747.08,778.91 3797.05,778.91 3806.14,769.83 3866.14,769.83 3886.06,769.83 3968.6,687.28 3968.6,649.42 v1(3969.37,648.66) ; v1(3689.96,450.71) 3690.55,450.12 3733.78,450.12 C1.2@3734.37,449.53 ; R7.2@3816.13,300.7 v1(3874.37,300.71) ; C2.2@3969.37,534.45 3994.37,509.45 v1(3994.37,500.71)
  Bottom Layer w20: v1(571.85,450.71) 826.26,450.71 ; v1(756.26,300.71) 791.59,300.71 826.26,335.37 826.26,450.71 ; v1(851.26,648.66) 851.26,525.71 v1(876.26,500.71) 826.26,450.71 ; v1(1351.38,450.71) 1605.79,450.71 ; v1(1535.79,300.71) 1571.12,300.71 1605.79,335.37 1605.79,450.71 ; v1(1630.78,648.66) 1630.78,525.71 v1(1655.79,500.71) 1605.79,450.71 ; v1(2130.9,450.71) 2385.31,450.71 ; v1(2315.31,300.71) 2350.65,300.71 2385.31,335.37 2385.31,450.71 ; v1(2410.31,648.66) 2410.31,525.71 v1(2435.31,500.71) 2385.31,450.71 ; v1(2910.43,450.71) 3164.84,450.71 ; v1(3094.84,300.71) 3130.18,300.71 3164.84,335.37 3164.84,450.71 ; v1(3189.84,648.66) 3189.84,525.71 v1(3214.84,500.71) 3164.84,450.71 ; v1(3689.96,450.71) 3944.37,450.71 ; v1(3874.37,300.71) 3909.7,300.71 3944.37,335.37 3944.37,450.71 ; v1(3969.37,648.66) 3969.37,525.71 v1(3994.37,500.71) 3944.37,450.71
VCCIN: C4.2 C5.2 FPC1.1 U2.1 U2.3 | length 2051
  Top Layer w10: FPC1.1@378.27,648.66 374.84,648.66 373.93,649.57 373.93,742.83 400.93,769.83 456.26,769.83 498.82,769.83 507.9,778.91 518.73,778.91 552.47,778.91 564.78,766.61 564.78,716.42 552.47,704.11 U2.3@518.73,704.11 ; FPC1.1@1157.8,648.66 1154.37,648.66 1153.46,649.57 1153.46,742.83 1180.46,769.83 1235.79,769.83 1278.34,769.83 1287.43,778.91 1298.26,778.91 1332,778.91 1344.31,766.61 1344.31,716.42 1332,704.11 U2.3@1298.26,704.11 ; FPC1.1@1937.32,648.66 1933.89,648.66 1932.99,649.57 1932.99,742.83 1959.99,769.83 2015.32,769.83 2057.87,769.83 2066.96,778.91 2077.79,778.91 2111.53,778.91 2123.83,766.61 2123.83,716.42 2111.53,704.11 U2.3@2077.79,704.11 ; FPC1.1@2716.85,648.66 2713.42,648.66 2712.51,649.57 2712.51,742.83 2739.51,769.83 2794.85,769.83 2837.4,769.83 2846.49,778.91 2857.31,778.91 2891.05,778.91 2903.36,766.61 2903.36,716.42 2891.05,704.11 U2.3@2857.31,704.11 ; FPC1.1@3496.38,648.66 3492.95,648.66 3492.04,649.57 3492.04,742.83 3519.04,769.83 3574.37,769.83 3616.93,769.83 3626.01,778.91 3636.84,778.91 3670.58,778.91 3682.89,766.61 3682.89,716.42 3670.58,704.11 U2.3@3636.84,704.11
pads on no net: FPC1.15 FPC1.16 U1.2 U2.4

## Polygon pours and split planes (outlines as drawn)
GND on Top Layer "Top Layer-GND" (solid, remove dead copper, pour order 76): 4014.37,890.71 3314.37,890.71 3289.37,865.71 3289.37,155.71 4024.37,155.71 4024.37,880.71
GND on Top Layer "Top Layer-GND" (solid, remove dead copper, pour order 72): 3234.84,890.71 2534.84,890.71 2509.84,865.71 2509.84,155.71 3244.84,155.71 3244.84,880.71
GND on Top Layer "Top Layer-GND" (solid, remove dead copper, pour order 68): 2455.31,890.71 1755.31,890.71 1730.31,865.71 1730.31,155.71 2465.31,155.71 2465.31,880.71
GND on Top Layer "Top Layer-GND" (solid, remove dead copper, pour order 64): 1675.79,890.71 975.79,890.71 950.79,865.71 950.79,155.71 1685.79,155.71 1685.79,880.71
GND on Top Layer "Top Layer-GND" (solid, remove dead copper, pour order 28): 896.26,890.71 196.26,890.71 171.26,865.71 171.26,155.71 906.26,155.71 906.26,880.71
GND on Bottom Layer "Bottom Layer-GND" (solid, remove dead copper, pour order 78): 3284.37,895.71 4034.37,895.71 4034.37,145.71 4029.37,150.71 3284.37,150.71
GND on Bottom Layer "Bottom Layer-GND" (solid, remove dead copper, pour order 74): 2504.84,895.71 3249.84,895.71 3249.84,150.71 2504.84,150.71
GND on Bottom Layer "Bottom Layer-GND" (solid, remove dead copper, pour order 70): 1725.31,895.71 2470.31,895.71 2470.31,150.71 1725.31,150.71
GND on Bottom Layer "Bottom Layer-GND" (solid, remove dead copper, pour order 66): 945.79,895.71 1691.85,895.71 1691.85,150.71 945.79,150.71
GND on Bottom Layer "Bottom Layer-GND" (solid, remove dead copper, pour order 30): 166.26,895.71 911.26,895.71 911.26,150.71 166.26,150.71

## Other copper
Top Layer:
  pour cut-out: 3489.37,795.71 3489.37,698.87 3499.98,688.25 3892.69,688.25 3892.69,787.27 3888.14,791.83
  pour cut-out: 3510.67,653.66 3527.4,636.93 3527.4,574.92 3604.78,574.92 3604.78,653.66
  pour cut-out: 3534.37,382.56 3534.37,257.99 3533.3,256.93 3882.31,256.93 3882.31,381.84
  pour cut-out: 3684.37,595.71 3684.4,595.68 3684.4,530.39 3819.8,530.39 3819.96,530.55 3816.13,534.37 3816.13,594.69
  pour cut-out: 3750.32,505.71 3750.32,407.44 3874.95,407.44 3878.21,410.71 3874.37,414.55 3874.37,505.71
  pour cut-out: 3558.16,614.48 3670.58,614.48 3662.21,606.11 3662.21,418.81 3559.57,418.81 3559.37,418.61
  pour cut-out: 2709.84,795.71 2709.84,698.87 2720.46,688.25 3113.16,688.25 3113.16,787.27 3108.61,791.83
  pour cut-out: 2731.14,653.66 2747.88,636.93 2747.88,574.92 2825.25,574.92 2825.25,653.66
  pour cut-out: 2754.84,382.56 2754.84,257.99 2753.78,256.93 3102.78,256.93 3102.78,381.84
  pour cut-out: 2904.84,595.71 2904.87,595.68 2904.87,530.39 3040.27,530.39 3040.43,530.55 3036.61,534.37 3036.61,594.69
  pour cut-out: 2970.79,505.71 2970.79,407.44 3095.42,407.44 3098.69,410.71 3094.84,414.55 3094.84,505.71
  pour cut-out: 2778.63,614.48 2891.05,614.48 2882.68,606.11 2882.68,418.81 2780.04,418.81 2779.84,418.61
  pour cut-out: 1930.31,795.71 1930.31,698.87 1940.93,688.25 2333.63,688.25 2333.63,787.27 2329.08,791.83
  pour cut-out: 1951.62,653.66 1968.35,636.93 1968.35,574.92 2045.72,574.92 2045.72,653.66
  pour cut-out: 1975.31,382.56 1975.31,257.99 1974.25,256.93 2323.25,256.93 2323.25,381.84
  pour cut-out: 2125.31,595.71 2125.34,595.68 2125.34,530.39 2260.75,530.39 2260.9,530.55 2257.08,534.37 2257.08,594.69
  pour cut-out: 2191.27,505.71 2191.27,407.44 2315.89,407.44 2319.16,410.71 2315.31,414.55 2315.31,505.71
  pour cut-out: 1999.1,614.48 2111.53,614.48 2103.15,606.11 2103.15,418.81 2000.51,418.81 2000.31,418.61
  pour cut-out: 1150.79,795.71 1150.79,698.87 1161.4,688.25 1554.11,688.25 1554.11,787.27 1549.55,791.83
  pour cut-out: 1172.09,653.66 1188.82,636.93 1188.82,574.92 1266.2,574.92 1266.2,653.66
  pour cut-out: 1195.79,382.56 1195.79,257.99 1194.72,256.93 1543.73,256.93 1543.73,381.84
  pour cut-out: 1345.79,595.71 1345.82,595.68 1345.82,530.39 1481.22,530.39 1481.37,530.55 1477.55,534.37 1477.55,594.69
  pour cut-out: 1411.74,505.71 1411.74,407.44 1536.37,407.44 1539.63,410.71 1535.79,414.55 1535.79,505.71
  pour cut-out: 1219.57,614.48 1332,614.48 1323.63,606.11 1323.63,418.81 1220.99,418.81 1220.79,418.61
  pour cut-out: 440.05,614.48 552.47,614.48 544.1,606.11 544.1,418.81 441.46,418.81 441.26,418.61
  pour cut-out: 632.21,505.71 632.21,407.44 756.84,407.44 760.1,410.71 756.26,414.55 756.26,505.71
  pour cut-out: 566.26,595.71 566.29,595.68 566.29,530.39 701.69,530.39 701.85,530.55 698.02,534.37 698.02,594.69
  pour cut-out: 416.26,382.56 416.26,257.99 415.19,256.93 764.2,256.93 764.2,381.84
  pour cut-out: 392.56,653.66 409.29,636.93 409.29,574.92 486.67,574.92 486.67,653.66
  pour cut-out: 371.26,795.71 371.26,698.87 381.87,688.25 774.58,688.25 774.58,787.27 770.03,791.83

## Silkscreen, mask and mechanical layers (free items; w line width, h text height)
Top Overlay:
  text "+" at 406.1,663.67 h50 r90
  text "+" at 1185.63,663.67 h50 r90
  text "+" at 1965.15,663.67 h50 r90
  text "+" at 2744.68,663.67 h50 r90
  text "+" at 3524.21,663.67 h50 r90
Drill Drawing:
  lines w6: 166.26,185.08 ccw(c205.63,185.08) 205.63,145.71 874.92,145.71 ccw(c874.92,185.08) 914.29,185.08 930.04,185.08 945.79,185.08 ccw(c985.16,185.08) 985.16,145.71 1654.45,145.71 ccw(c1654.45,185.08) 1693.82,185.08 1709.57,185.08 1725.31,185.08 ccw(c1764.68,185.08) 1764.68,145.71 2433.98,145.71 ccw(c2433.98,185.08) 2473.35,185.08 2489.09,185.08 2504.84,185.08 ccw(c2544.21,185.08) 2544.21,145.71 3213.5,145.71 ccw(c3213.5,185.08) 3252.87,185.08 3268.62,185.08 3284.37,185.08 ccw(c3323.74,185.08) 3323.74,145.71 3993.03,145.71 ccw(c3993.03,185.08) 4032.4,185.08 4032.4,854.37 ccw(c3993.03,854.37) 3993.03,893.74 3323.74,893.74 ccw(c3323.74,854.37) 3284.37,854.37 3268.62,854.37 3252.87,854.37 ccw(c3213.5,854.37) 3213.5,893.74 2544.21,893.74 ccw(c2544.21,854.37) 2504.84,854.37 2489.09,854.37 2473.35,854.37 ccw(c2433.98,854.37) 2433.98,893.74 1764.68,893.74 ccw(c1764.68,854.37) 1725.31,854.37 1709.57,854.37 1693.82,854.37 ccw(c1654.45,854.37) 1654.45,893.74 985.16,893.74 ccw(c985.16,854.37) 945.79,854.37 930.04,854.37 914.29,854.37 ccw(c874.92,854.37) 874.92,893.74 205.63,893.74 ccw(c205.63,854.37) 166.26,854.37 166.26,185.08